# Altium PCB PCB1.PcbDoc
Units mil, origin at the board's own origin, x right, y up, seen from the top; angles counter-clockwise.
Board outline 2850 x 1850 mil, 2 copper layers (Top Layer, Bottom Layer); 47 components, 34 nets, 140 pads, 3 vias.
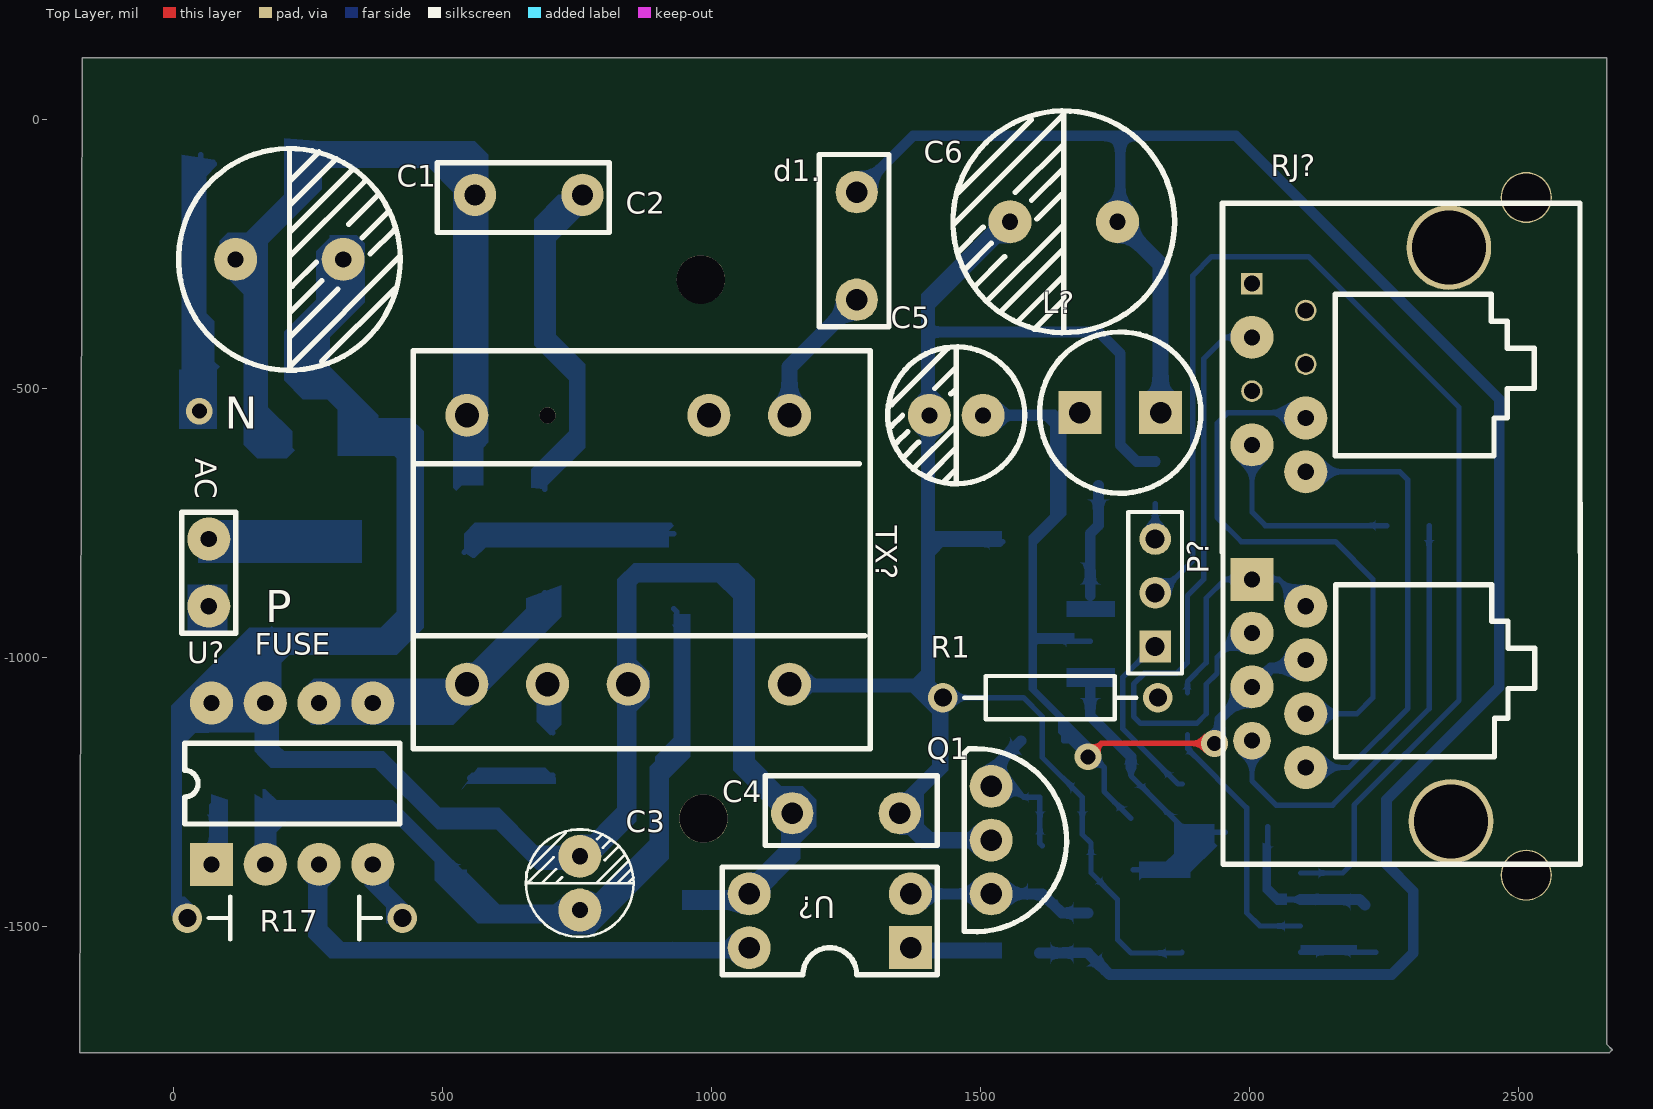
[diagram p0: Top Layer view]
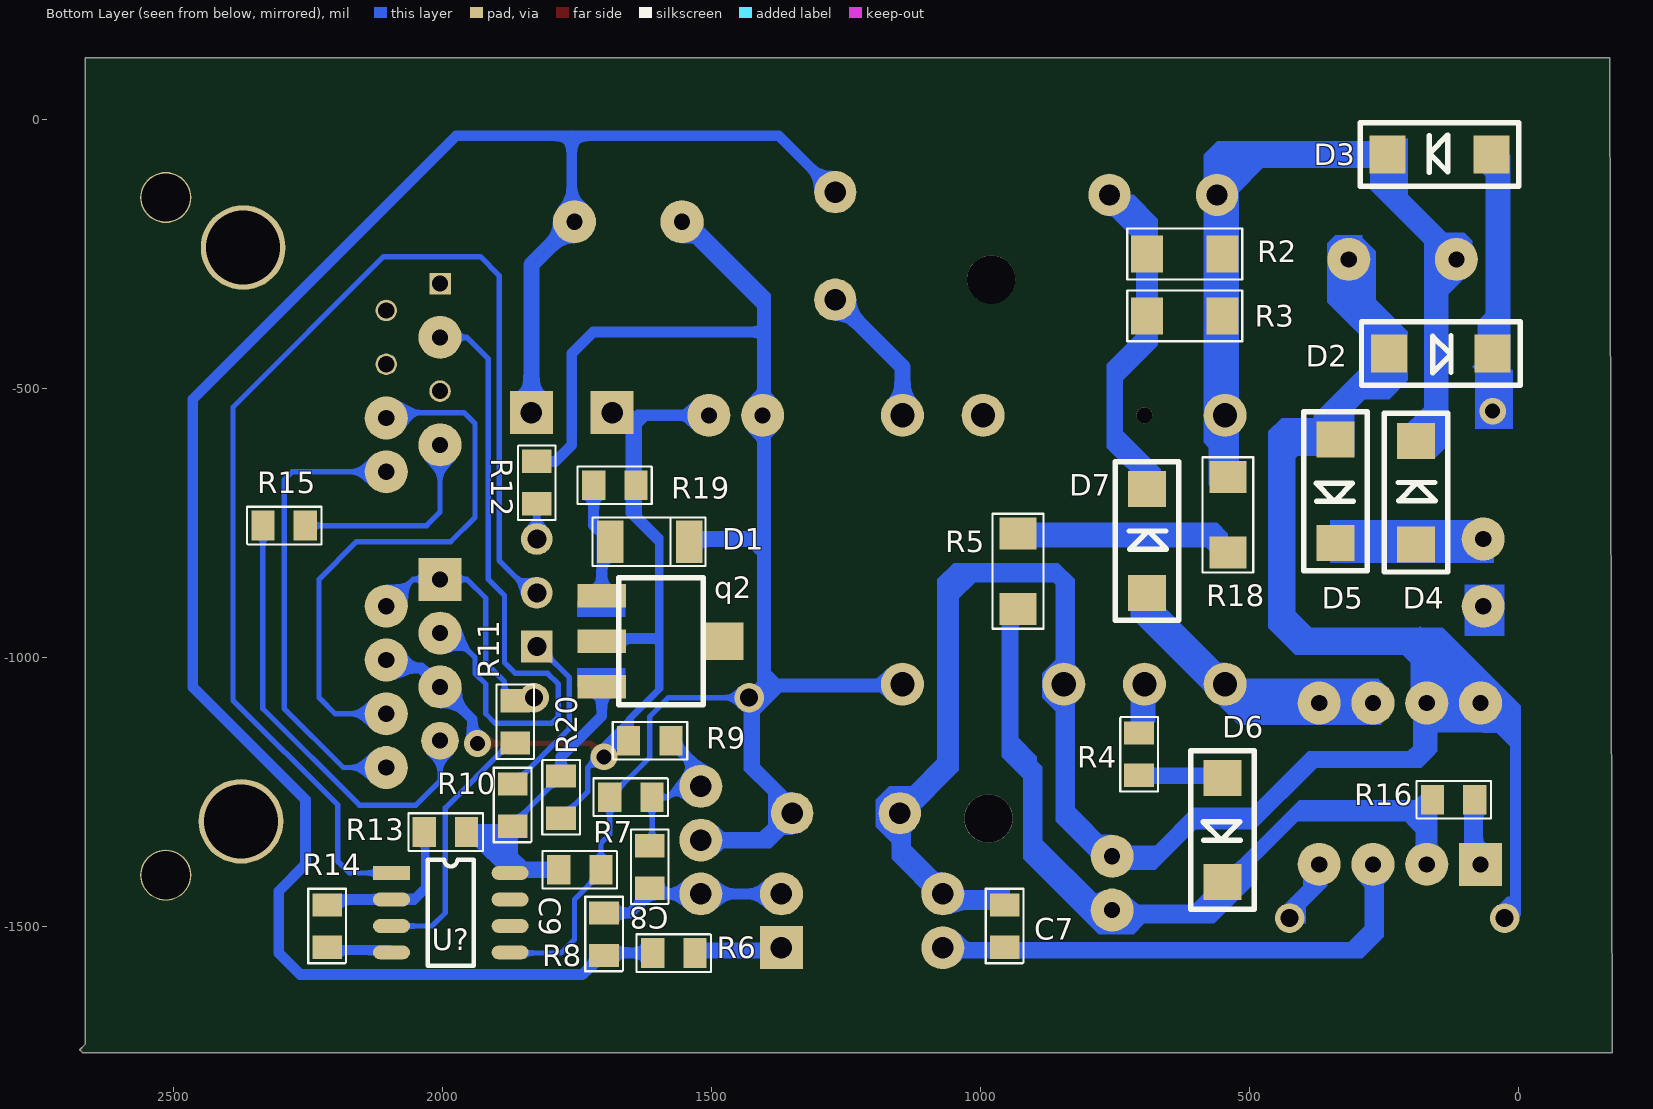
[diagram p1: Bottom Layer view, seen from below]

## Layer stack, top to bottom
Top Solder: solder mask 0.4, Solder Resist, Dk 3.5
Top Layer: signal copper 1.4
Dielectric 1: dielectric 12.6, FR-4, Dk 4.8
Bottom Layer: signal copper 1.4
Bottom Solder: solder mask 0.4, Solder Resist, Dk 3.5

## Board outline
-170,115 2665,115 2665,-1720 2675,-1730 2670,-1735 -175,-1735

## Design rules (kind name [scope] priority, off if disabled: settings)
Clearance [All] p1: gap=10
PolygonConnect [All] p1: connectstyle=Relief reliefconductorwidth=10 reliefentries=4 polygonreliefangle="90 Angle" airgapwidth=10
RoutingVias [All] p1: holewidth=28 width=50 viastyle="Through Hole" minholewidth=28 minwidth=50 maxholewidth=28 maxwidth=50
SolderMaskExpansion [All] p1: expansion=4
UnpouredPolygon [All] p1: allowunpoured=FALSE
Width [All] p1: maxlimit=80 minlimit=10 preferedwidth=10
29 further rules are at their usual default settings.

## Classes and differential pairs
component class Sheet2: C1 C2 C3 D2 D3 D4 D5 D6 D7 FUSE R2 R3 R4 R5 R16 R17 R18 TX? U?
component class Sheet1: C4 C5 C6 C7 C8 C9 D1 d1. L? P? Q1 q2 R1 R6 R7 R8 R9 R10 R11 R12 R13 R14 R15 R19 R20 RJ? U?

## Components (designator, comment, footprint, x,y, rotation, side; value= is the part's Value field where it differs from the comment)
C1 "Cap" CAP_470uF 215,-260 r0 top
C2 "Cap" CAP_P 760,-140 r180 top
C3 "Cap" CAPACITOR10UF/63V 755,-1420 r90 top
C4 "Cap" CAP_P 1150,-1290 r0 top
C5 "Cap" CAP_220uF 1455,-550 r180 top
C6 "Cap" CAP_470uF 1655,-190 r180 top
C7 "Cap" RES0805 955,-1500 r90 bottom
C8 "Cap" RES0805 1615,-1390 r90 bottom
C9 "Cap" RES0805 1745,-1395 r0 bottom
D1 "DIODE" SOD-80 1615,-785 r0 bottom
d1. "Cap" CAP_P 1270,-335 r90 top
D2 "DIODE-SS14" DO-214AC 130,-435 r0 bottom
D3 "DIODE-SS14" DO-214AC 160,-65 r180 bottom
D4 "DIODE-SS14" DO-214AC 190,-680 r270 bottom
D5 "DIODE-SS14" DO-214AC 340,-705 r90 bottom
D6 "DIODE-SS14" DO-214AC 550,-1335 r90 bottom
D7 "DIODE-SS14" DO-214AC 690,-770 r270 bottom
FUSE "Res" Res_150mil 65,-830 r270 top
L? "Inductor" Inductor 1835,-545 r0 top
P? "Header 3" HDR1X3 1825,-980 r90 top
Q1 "TL431A" TL431A 1520,-1340 r0 top
q2 "Reg" LM1117 1590,-970 r270 bottom
R1 "Res2" AXIAL-0.4 1630,-1075 r180 top
R2 "Res1206" 1206 690,-250 r180 bottom
R3 "Res1206" 1206 690,-365 r180 bottom
R4 "Res" RES0805 705,-1180 r270 bottom
R5 "Res1206" 1206 930,-770 r270 bottom
R6 "Res" RES0805 1570,-1550 r0 bottom
R7 "Res" RES0805 1650,-1260 r0 bottom
R8 "Res" RES0805 1700,-1515 r90 bottom
R9 "Res" RES0805 1615,-1155 r180 bottom
R10 "Res" RES0805 1870,-1275 r90 bottom
R11 "Res" RES0805 1865,-1120 r90 bottom
R12 "Res" RES0805 1825,-675 r270 bottom
R13 "Res" RES0805 1995,-1325 r180 bottom
R14 "Res" RES0805 2215,-1500 r90 bottom
R15 "Res" RES0805 2295,-755 r180 bottom
R16 "Res" RES0805 120,-1265 r180 bottom
R17 "Res2" AXIAL-0.4 225,-1485 r180 top
R18 "Res1206" 1206 540,-805 r90 bottom
R19 "Res" RES0805 1680,-680 r0 bottom
R20 "Res" RES0805 1780,-1260 r270 bottom
RJ? "RJ_DUAL" RJ_DUAL 2005,-305 r270 top locked
TX? "RC_FILTER" RC_FILTER 1145,-550 r270 top
U? "LM358" SOIC_8pin 1985,-1475 r180 bottom
U? "PC817" PC817 1220,-1540 r180 top
U? "PR6224T" PR6224T 70,-1385 r90 top

## Footprints (in the part's own frame and the unit in brackets; to place one, negate y for a bottom-side part, rotate by r counter-clockwise, add the part's x,y. Pads: shape width x height; smd on the part's side, far side on the other; paste and mask are expansions set on the pad)
1206 [mm]
  rect 1.504x1.75 smd: 1(0,0) 2(3.556,0)
  silkscreen extent -0.94,-1.2 4.5,1.2
AXIAL-0.4 [mm] "Axial Device, Thru-Hole; 2 Leads; 0.4 in Pin Spacing"
  round 1.4 hole 0.85: 1(-5.08,0) 2(5.08,0)
  silkscreen extent -4.06,-1.02 4.06,1.02
CAP_220uF [mil]
  round 80 hole 30: 1(-50,0) 2(50,0)
  silkscreen extent -127,-127 127,127
CAP_470uF [mil]
  round 80 hole 30: 1(-100,0) 2(100,0)
  silkscreen extent -206,-206 206,206
CAP_P [mm]
  round 2 hole 1: 1(0,0) 2(5.08,0)
  silkscreen extent -1.27,-1.52 6.86,1.78
CAPACITOR10UF/63V [mil]
  round 80 hole 30: 1(-50,0) 2(50,0)
  silkscreen extent -100,-100 100,100
DO-214AC [mm] "SMD DIODE"
  rect 1.7x1.8 smd: 1(2.8,0) 2(-2.1,0)
  silkscreen extent -3.4,-1.5 4.1,1.5
HDR1X3 [mm] "Connector; Header; 3 Position"
  rect 1.5x1.5 hole 0.9: 1(0,0)
  round 1.5 hole 0.9: 2(2.54,0) 3(5.08,0)
  silkscreen extent -1.27,-1.27 6.35,1.27
Inductor [mil] "Inducutor for TSOP"
  rect 80x80 hole 40: 1(-150,0) 2(0,0)
  silkscreen extent -225,-150 75,150
LM1117 [mm]
  rect 1.1x2.3 smd: 1(-2.15,-2.9) 2(0,-2.9) 3(2.15,-2.9)
  rect 1.778x1.778 smd: 4(0,2.9)
  silkscreen extent -3,-2.1 3,1.9
PC817 [mil]
  rect 80x80 hole 40: 1(-150,0)
  round 80 hole 40: 2(-150,-100) 3(150,-100) 4(150,0)
  silkscreen extent -200,-150 200,50
PR6224T [mil]
  rect 80x80 / inner rect 100x50 / far side rect 80x80 hole 30: 1(0,0)
  round 80 / inner oval 100x50 / far side round 80 hole 30: 2(0,-100) 3(0,-200) 4(0,-300) 5(300,-300) 6(300,-200) 7(300,-100) 8(300,0)
  silkscreen extent 75,-350 225,50
RC_FILTER [mil]
  round 80 hole 45: 1(0,0) 2(0,-150) 5(0,-600) 6(500,-600) 7(500,-450) 8(500,-300) 10(500,0)
  round 0 all layers, no hole: 3(0,-300)
  round 30 hole 30: 4(0,-450)
  round 1 all layers, no hole: 9(500,-150)
  silkscreen extent -120,-700 620,150
RES0805 [mm]
  rect 1.1x1.4 smd: 1(-1,0) 2(1,0)
  silkscreen extent -1.75,-0.89 1.77,0.89
Res_150mil [mil] "vertical placement"
  round 80 hole 30: 1(-50,0) 2(75,0)
  silkscreen extent -100,-50 125,50
RJ_DUAL [mil]
  round 95 hole 90: 0(-160,510) 1(1100,510)
  rect 40x40 hole 30: 1(0,0)
  round 40 hole 30: 2(50,100) 4(150,100) 5(200,0)
  round 80 hole 30: 3(100,0) 6(250,100) 7(300,0) 8(350,100) 10(600,100) 11(650,0) 12(700,100) 13(750,0) 14(800,100) 16(900,100)
  rect 80x80 hole 30: 9(550,0)
  round 70 hole 30: 15(850,0)
  round 157.48 hole 137.8: ""(-66.93,366.14) ""(1000,370)
  silkscreen extent -150,-55 1080,611
SOD-80 [mm] "SMD DIODE 4148"
  rect 1.25x2 smd: 1(-1.875,0) 2(1.875,0)
  silkscreen extent -2.64,-1.14 2.7,1.14
SOIC_8pin [mm]
  rect 1.75x0.65 smd: 1(-2.8,1.875)
  oval 1.75x0.65 smd: 2(-2.8,0.625) 3(-2.8,-0.625) 4(-2.8,-1.875) 5(2.8,-1.875) 6(2.8,-0.625) 7(2.8,0.625) 8(2.8,1.875)
  silkscreen extent -1.09,-2.5 1.09,2.5
TL431A [mil]
  round 80 hole 40: 1(0,100) 2(0,0) 3(0,-100)
  silkscreen extent -50,-170 140,170

## Part data
C1 C6: library part CAP_470uF, "CAP_470uF"
C2 C4 d1.: library part Capacitor, "Capacitor"
C3: library part Cap-10uf/63V, "Cap10uf/63V"
C5: library part CAP_220uF, "Cap_220uF"
C7 C8 C9: library part CAP_104_SMD, "Cap_104_SMD"
D1: library part DIODE_4148, "HIGH SPEED DIODE"
D2 D3 D4 D5 D6 D7: "SS14"
FUSE: library part "Res vertical placement", "Res vertical placement"
L?: "Inductor for TSOP"
P?: "Header, 3-Pin"
Q1: library part "TL431A_Adjustable Zener"
q2: library part LM1117
R1 R17: "Resistor"
R4 R6 R7 R8 R9 R10 R11 R12 R13 R14 R15 R16 R19 R20: library part Resistor, "Res0805"
U?: "Dule op-Amp"
U?: "Opto coupler"
U?: "MOSFET"

## Free pads (board coordinates)
  round 90 hole 90: 0(980,-297.52) 1(985,-1299.83)

## Via types
v1: diameter 50, hole 28, Top Layer to Bottom Layer, 3 vias

## Nets (pads, with @x,y where several pads share a name; then routed paths per layer and width w, separated by ;. In a path a pad name is that pad's centre, name@x,y a point inside that pad or via, vN(x,y) a via of type N, cw(c..) or ccw(c..) an arc to the next point about the centre after c; other vN are vias at no path point)
+5V: C9.2 q2.3 R10.1 R13.2 R20.1 U?.8@1874.76,-1401.18 | length 577.8
  Bottom Layer w10: R20.1@1780,-1205 R20.1 R10.1@1871.87,-1312.5 ; C9.2 1868.58,-1395 1870,-1393.58 R10.1 ; R10.1@1875,-1314.37 1885.63,-1325 R13.2
  Bottom Layer w20: q2.3 1704.17,-1109.17 1780,-1185 R20.1@1780,-1205
DRAIN: D7.1 TX?.6 U?.5@370,-1085 U?.6@270,-1085 | length 519.3
  Bottom Layer w10: U?.6@270,-1085 370,-1085 510,-1085 TX?.6 690,-905 D7.1
FB: C7.1 U?.3@270,-1385 U?.4@1070,-1540 | length 934.1
  Bottom Layer w10: U?.3@270,-1385 270,-1504.37 305,-1539.37 C7.1 955.63,-1540 U?.4@1070,-1540
GND: C4.2 C5.2 C6.2 C9.1 D1.1 Q1.2 R1.2 R7.2 R12.1 TX?.10 U?.5@1874.76,-1548.82 | length 3217.2
  Bottom Layer w10: TX?.10 1405,-1050 ; 1405,-790 1536.18,-790 D1.1 ; Q1.2 1400,-1340 C4.2 1425,-1215 1425,-1080 R1.2 ; C6.2 1405,-340 1405,-395 C5.2 1405,-1050 ; U?.5@1874.76,-1548.82 1873.58,-1550 1780,-1550 1755,-1525 1755,-1450 1705.63,-1400.63 C9.1 1705.63,-1345.63 1689.37,-1329.37 R7.2 1688.95,-1260 1615,-1186.05 1615,-1110 1580,-1075 R1.2 ; 1405,-1050 R1.2
  Bottom Layer w20: 1405,-395 1720,-395 1760,-435 1760,-605 1790.63,-635.63 R12.1
GND1: C1.2 C3.2 C4.1 C7.2 D2.1 D5.1 R17.2 TX?.8 U?.3@1070,-1440 U?.7@170,-1085 U?.8@70,-1085 | length 3354.8
  Bottom Layer w10: R17.2 5,-1465 5,-1150 70,-1085 170,-1085 170,-1155 200,-1185 375,-1185 490,-1300 605,-1300 675,-1370 C3.2 845,-1280 TX?.8 845,-855 855,-845 1010,-845 1060,-895 1060,-1200 C4.1 1150,-1360 1070,-1440 1049.37,-1460.63 C7.2 ; C1.2 315,-335 ; D5.1@355,-595 345,-585 345,-555 240.24,-450.24 D2.1 ; D2.1 315,-360.24 315,-335 ; D2.1 240.24,-409.76 315,-335
NetC1_1: C1.1 C2.2 D3.2 D4.2 R2.2 R3.2 R18.2 TX?.5 | length 1497.9
  Bottom Layer w10: D4.2 150,-557.32 150,-300 115,-265 C1.1 242.68,-132.32 D3.2 485,-65 C2.2 545,-155 TX?.5 545,-660 R18.2
NetC2_1: C2.1 D7.2 R2.1 R3.1 | length 626
  Bottom Layer w10: D7.2 690,-655 750,-595 750,-465 690,-405 R3.1 R2.1 690,-210 C2.1
NetC3_1: C3.1 D6.2 R5.2 R16.1 U?.2@170,-1385 | length 1471.9
  Bottom Layer w10: U?.2@170,-1385 170,-1254.37 185.63,-1270 405,-1270 550,-1415 D6.2 602.32,-1470 C3.1 ; C3.1@765,-1480 C3.1 ; R5.2 935,-915 935,-1160 890,-1205 890,-1360 780,-1470 C3.1
NetC6_1: C6.1 d1..2 L?.2 R6.2 R8.1 | length 3903.8
  Bottom Layer w10: R6.2 1613.74,-1554.37 1652.5,-1549.37
  Bottom Layer w20: d1..2 1375,-30 1760,-30 ; R6.2 1652.5,-1550 ; 1652.5,-1549.37 1700,-1549.37 1704.37,-1554.37 1740,-1590 2265,-1590 2305,-1550 2305,-1435 2255,-1385 2255,-1265 2465,-1055 2465,-520 1975,-30 1760,-30 ; C6.1 1760,-185 1760,-30
  Bottom Layer w30: C6.1 1835,-270 L?.2
NetC8_1: C8.1 Q1.3 R8.2 U?.2@1370,-1440 | length 344.8
  Bottom Layer w20: U?.2@1370,-1440 Q1.3 1615.63,-1440 1651.26,-1475.63 R8.2
NetC8_2: C8.2 Q1.1 R7.1 R9.2 | length 299.4
  Bottom Layer w10: Q1.1 1560,-1240 1580,-1260 R7.1 1610.63,-1346.26 C8.2
  Bottom Layer w20: Q1.1 1520,-1210.63 R9.2
NetD1_2: D1.2 q2.1 R19.2 | length 211.6
  Bottom Layer w20: q2.1 1704.17,-769.65 1719.37,-754.45 R19.2
NetD2_2: D2.2 D3.1 | length 482.1
  Top Layer w10: v1(47.32,-542.32) v1@50,-545
  Bottom Layer w10: v1(47.32,-542.32) D2.2 49.76,-432.56 D3.1
NetD4_1: D4.1 D5.2 FUSE.1 | length 280.3
  Bottom Layer w10: FUSE.1@65,-775 77.68,-787.68 D5.2
NetD6_1: D6.1 R4.2 | length 157.2
  Bottom Layer w10: D6.1 555.39,-1219.37 R4.2
NetP?_1: P?.1 R10.2 | length 332.5
  Bottom Layer w10: P?.1 1821.72,-980 1765,-1036.72 1765,-1133.28 1867.35,-1235.63 R10.2@1875,-1235.63
NetP?_2: P?.2 U?.1@2095.24,-1401.18 | length 2284.6
  Bottom Layer w10: P?.2 1835,-880 1895,-820 1895,-290 1930,-255 2110,-255 2390,-535 2390,-1080 2195,-1275 2195,-1380 2173.82,-1401.18 U?.1@2095.24,-1401.18
NetP?_3: P?.3 R12.2 | length 65.6
  Bottom Layer w10: P?.3 R12.2
NetR1_1: R1.1 R11.2 RJ?.9 RJ?.10 | length 410.3
  Bottom Layer w10: R11.2@1885,-1065.63 1885,-1045 1920,-1010 1920,-890 1955,-855 RJ?.9 2055,-855 RJ?.10
NetR4_1: R4.1 TX?.7 | length 94.8
  Bottom Layer w10: TX?.7 695,-1130.63 R4.1
NetR5_1: R5.1 R18.1 | length 404.5
  Bottom Layer w10: R18.1 575,-770 R5.1
NetR6_1: R6.1 U?.1@1370,-1540 | length 164.8
  Bottom Layer w10: U?.1@1370,-1540 1520.63,-1540 R6.1
NetR13_1: R13.1 R14.2 U?.2@2095.24,-1450.39 | length 307.9
  Bottom Layer w10: R13.1@2034.37,-1315 2034.37,-1429.37 2055.39,-1450.39 U?.2@2095.24,-1450.39
  Bottom Layer w20: U?.2@2095.24,-1450.39 2204.76,-1450.39 R14.2
NetR14_1: R14.1 U?.4@2095.24,-1548.82 | length 140.3
  Bottom Layer w10: U?.4@2095.24,-1548.82 R14.1@2235.55,-1548.82
NetR15_1: R15.1 RJ?.15 | length 837.9
  Bottom Layer w10: RJ?.15 2005,-1230 2050,-1275 2155,-1275 2334.37,-1095.63 R15.1
NetR15_2: R15.2 RJ?.7 | length 386
  Bottom Layer w10: RJ?.7 2005,-730 2030,-755 R15.2
NetR16_2: R16.2 U?.1@70,-1385 | length 109.4
  Bottom Layer w10: U?.1@70,-1385 R16.2@70,-1275.63
NetR17_1: R17.1 U?.4@370,-1385 | length 122.8
  Bottom Layer w10: U?.4@370,-1385 370,-1430 R17.1
NetRJ?_3: RJ?.3 RJ?.11 | length 1205.1
  Bottom Layer w10: RJ?.11 1985,-955 1940,-1000 1940,-1030 1920,-1050 1920,-1105 1902.28,-1122.72 1797.72,-1122.72 1785,-1110 1785,-1050 1805,-1030 1865,-1030 1885,-1010 1885,-885 1915,-855 1915,-445 1955,-405 RJ?.3
NetRJ?_6: RJ?.6 RJ?.14 | length 1053.3
  Bottom Layer w10: RJ?.14 2200,-1105 2230,-1075 2230,-855 2160,-785 1985,-785 1940,-740 1940,-565 1960,-545 2105,-545 RJ?.6
NetRJ?_8: RJ?.8 RJ?.16 | length 856.8
  Bottom Layer w10: RJ?.16 2185,-1205 2295,-1095 2295,-670 2280,-655 RJ?.8
NON-INVERTIN_3PIN: R11.1 U?.3@2095.24,-1499.61 | length 486.6
  Bottom Layer w10: R11.1@1885,-1144.37 1885,-1170 1995,-1280 1995,-1475 2019.61,-1499.61 U?.3@2095.24,-1499.61
OUT_RJ11.12: C5.1 L?.1 q2.2 R9.1 R19.1 R20.2 RJ?.12 RJ?.13 | length 1699.2
  Top Layer w10: v1(1700,-1185) 1725,-1160 v1(1935,-1160) 1935,-1170 v1@1930,-1175
  Bottom Layer w10: C5.1 1680,-550 L?.1 ; 1635,-550 1640.63,-555.63 R19.1 1640.63,-739.37 1595,-785 1595,-970 ; v1(1700,-1185) 1702.5,-1182.5 v1@1707.5,-1182.5 ; q2.2 1595,-970 ; R20.2 1730,-1249.37 1730,-1205 v1@1707.5,-1182.5 ; RJ?.12@2085,-1005 RJ?.12 ; 1595,-970 1595,-1055 1654.37,-1114.37 R9.1 1680,-1155 v1@1707.5,-1182.5
  Bottom Layer w20: v1(1935,-1160) 1945,-1150 1945,-1115 RJ?.13 2040,-1020 2090,-1020 RJ?.12
TX1: d1..1 TX?.1 | length 266.8
  Bottom Layer w30: TX?.1 1145,-460 d1..1
pads on no net: FUSE.2 q2.4 RJ?. RJ?.0 RJ?.1 RJ?.2 RJ?.4 RJ?.5 TX?.2 TX?.3 TX?.4 TX?.9 U?.6@1874.76,-1499.61 U?.7@1874.76,-1450.39

## Other copper
Bottom Layer:
  rectangle net NetD2_2: 10,-575 80,-465
  rectangle net GND1: 40,-1140 195,-1045
  rectangle: 25,-960 100,-865
  rectangle net GND1: 945,-1470 1075,-1432.5
  rectangle net NetD4_1: 45,-825 350,-745
  rectangle net NetR6_1: 1360,-1560 1540,-1530
  rectangle net GND: 1405,-790 1540,-765
  rectangle net OUT_RJ11.12: 1595,-970 1675,-955
  rectangle net NetR14_1: 2095.24,-1548.82 2200,-1535
  rectangle net NetD1_2: 1660,-925 1750,-895
  rectangle net +5V: 1660,-1055 1750,-1020
  region net NetR13_1: 2040,-1350 2040,-1425 2055,-1440 2070,-1440 2070,-1460 2050,-1460 2025,-1435 2025,-1345
  region net NetD2_2: 15,-65 15,-465 80,-465 85,-460 75,-450 75,-375 60,-360 60,-105 80,-85 80,-80 75,-75
  region net NetC1_1: 205,-35 205,-140 135,-210 100,-210 85,-225 85,-280 130,-325 130,-605 155,-630 210,-630 225,-615 220,-610 220,-580 175,-535 175,-230 275,-130 275,-40
  region net NetC1_1: 260,-90 475,-90 520,-135 520,-685 525,-690 535,-680 575,-680 575,-610 585,-600 585,-65 560,-40 250,-40
  region net GND1: 290,-220 265,-245 265,-335 205,-395 205,-485 240,-520 285,-520 305,-540 305,-625 380,-625 380,-550 290,-460 290,-405 355,-340 355,-230 340,-215 290,-215
  region net GND1: 365,-625 410,-625 415,-630 415,-915 385,-945 180,-945 130,-995 130,-1085 160,-1115 175,-1100 200,-1100 200,-1010 215,-995 415,-995 465,-945 465,-580 440,-555 345,-555
  region net GND1: 40,-1045 80,-1045 182.5,-942.5 195,-955 195,-1055 160,-1090
  region net GND1: 65,-1140 40,-1140 15,-1165 15,-1445 20,-1445 45,-1470 45,-1485 25,-1505 20,-1505 -5,-1480 -5,-1090 140,-945 230,-945
  region net GND1: 195,-1045 195,-1165 205,-1175 390,-1175 495,-1280 605,-1280 675,-1350 755,-1350 825,-1280 825,-855 855,-825 1050,-825 1080,-855 1080,-1190 1130,-1240 1170,-1240 1195,-1265 1195,-1315 1165,-1345 1165,-1375 1080,-1460 1075,-1460 1075,-1405 1130,-1350 1130,-1300 1040,-1210 1040,-890 1010,-860 865,-860 860,-865 860,-1005 885,-1030 885,-1075 860,-1100 860,-1305 770,-1395 675,-1395 600,-1320 490,-1320 375,-1205 180,-1205 155,-1180 160,-1175 160,-1050 145,-1050 140,-1055 150,-1065 150,-1175 175,-1200
  region net GND1: 180,-1205 150,-1175 155,-1170 155,-1075 195,-1075
  region net NetC3_1: 960,-920 960,-1185 920,-1225 920,-1375 780,-1515 715,-1515 695,-1495 565,-1495 485,-1415 485,-1380 410,-1305 180,-1305 165,-1290 165,-1245 170,-1245 195,-1270 410,-1270 535,-1395 545,-1395 545,-1400 605,-1460 770,-1460 770,-1455 895,-1330 895,-1185 930,-1150 930,-920
  region net NetC2_1: 665,-685 665,-650 735,-580 735,-485 670,-420 670,-185 715,-140 760,-140 760,-175 710,-225 710,-400 765,-455 765,-610 690,-685 690,-687.32
  region net DRAIN: 655,-890 655,-910 525,-1040 260,-1040 237.5,-1062.5 255,-1080 255,-1125 520,-1125 720,-925 720,-866.36
  region net NetD6_1: 565,-1205 690.63,-1205 710,-1224.37 710,-1235 545,-1235 535,-1245
  region net NetC3_1: 150,-1255 150,-1405 145,-1410 190,-1410 190,-1325 220,-1295
  region net NetR16_2: 100,-1265 100,-1405 50,-1405 70,-1385 70,-1255
  region net NetR17_1: 400,-1380 400,-1425 445,-1470 445,-1485 435,-1495 395,-1495 395,-1465 355,-1425 355,-1380
  region net FB: 285,-1390 285,-1500 315,-1530 1080,-1530 1090,-1540 1090,-1560 290,-1560 250,-1520 250,-1380
  region net NetR4_1: 675,-1040 675,-1120 700,-1145 720,-1125 720,-1045 710,-1035
  region net NetR5_1: 555,-815 560,-815 580,-795 920,-795 920,-765 930,-755 925,-750 560,-750 540,-770 540,-805
  region net GND: 1530,-1325 1410,-1325 1395,-1310 1395,-1255 1440,-1210 1440,-1070 1415,-1045 1415,-810 1435,-790 1536.18,-790 1536.18,-786.18 1520,-770 1510,-780 1425,-780 1415,-770 1415,-350 1540,-225 1575,-225 1575,-190 1565,-180 1560,-185 1515,-185 1515,-200 1390,-325 1390,-1025 1375,-1040 1165,-1040 1155,-1050 1155,-1065 1370,-1065 1410,-1105 1410,-1200 1350,-1260 1350,-1330 1365,-1330 1390,-1355 1530,-1355
  region net OUT_RJ11.12: 1515,-560 1620,-560 1630,-570 1630,-735 1590,-775 1590,-1060 1645,-1115 1645,-1140 1700,-1195 1710,-1185 1710,-1165 1605,-1060 1605,-790 1660,-735 1660,-560 1640,-540 1510,-540
  region net +5V: 1860,-1365 1845,-1380 1795,-1380 1795,-1415 1800,-1410 1890,-1410 1890,-1400 1940,-1350 1935,-1345 1935,-1310 1869.37,-1310 1860,-1300.63

## Silkscreen, mask and mechanical layers (free items; w line width, h text height)
Top Overlay:
  text "N" at 95,-575 h60
  text "AC" at 40,-630 h40 r270
  text "P" at 170,-935 h60
Bottom Solder:
  rectangle: 1655,-1045 1750,-1015
  rectangle: 1655,-930 1750,-905
Mechanical 1:
  lines w10: -15,-1610 2595,-1610 2595,0 -15,0 -15,-1610